# Altium PCB Relay_Board.PcbDoc
Units mm, origin at the board's own origin, x right, y up, seen from the top; angles counter-clockwise.
Board outline 36.96 x 35.69 mm, 2 copper layers (Top Layer, Bottom Layer); 5 components, 4 nets, 15 pads, 0 vias.
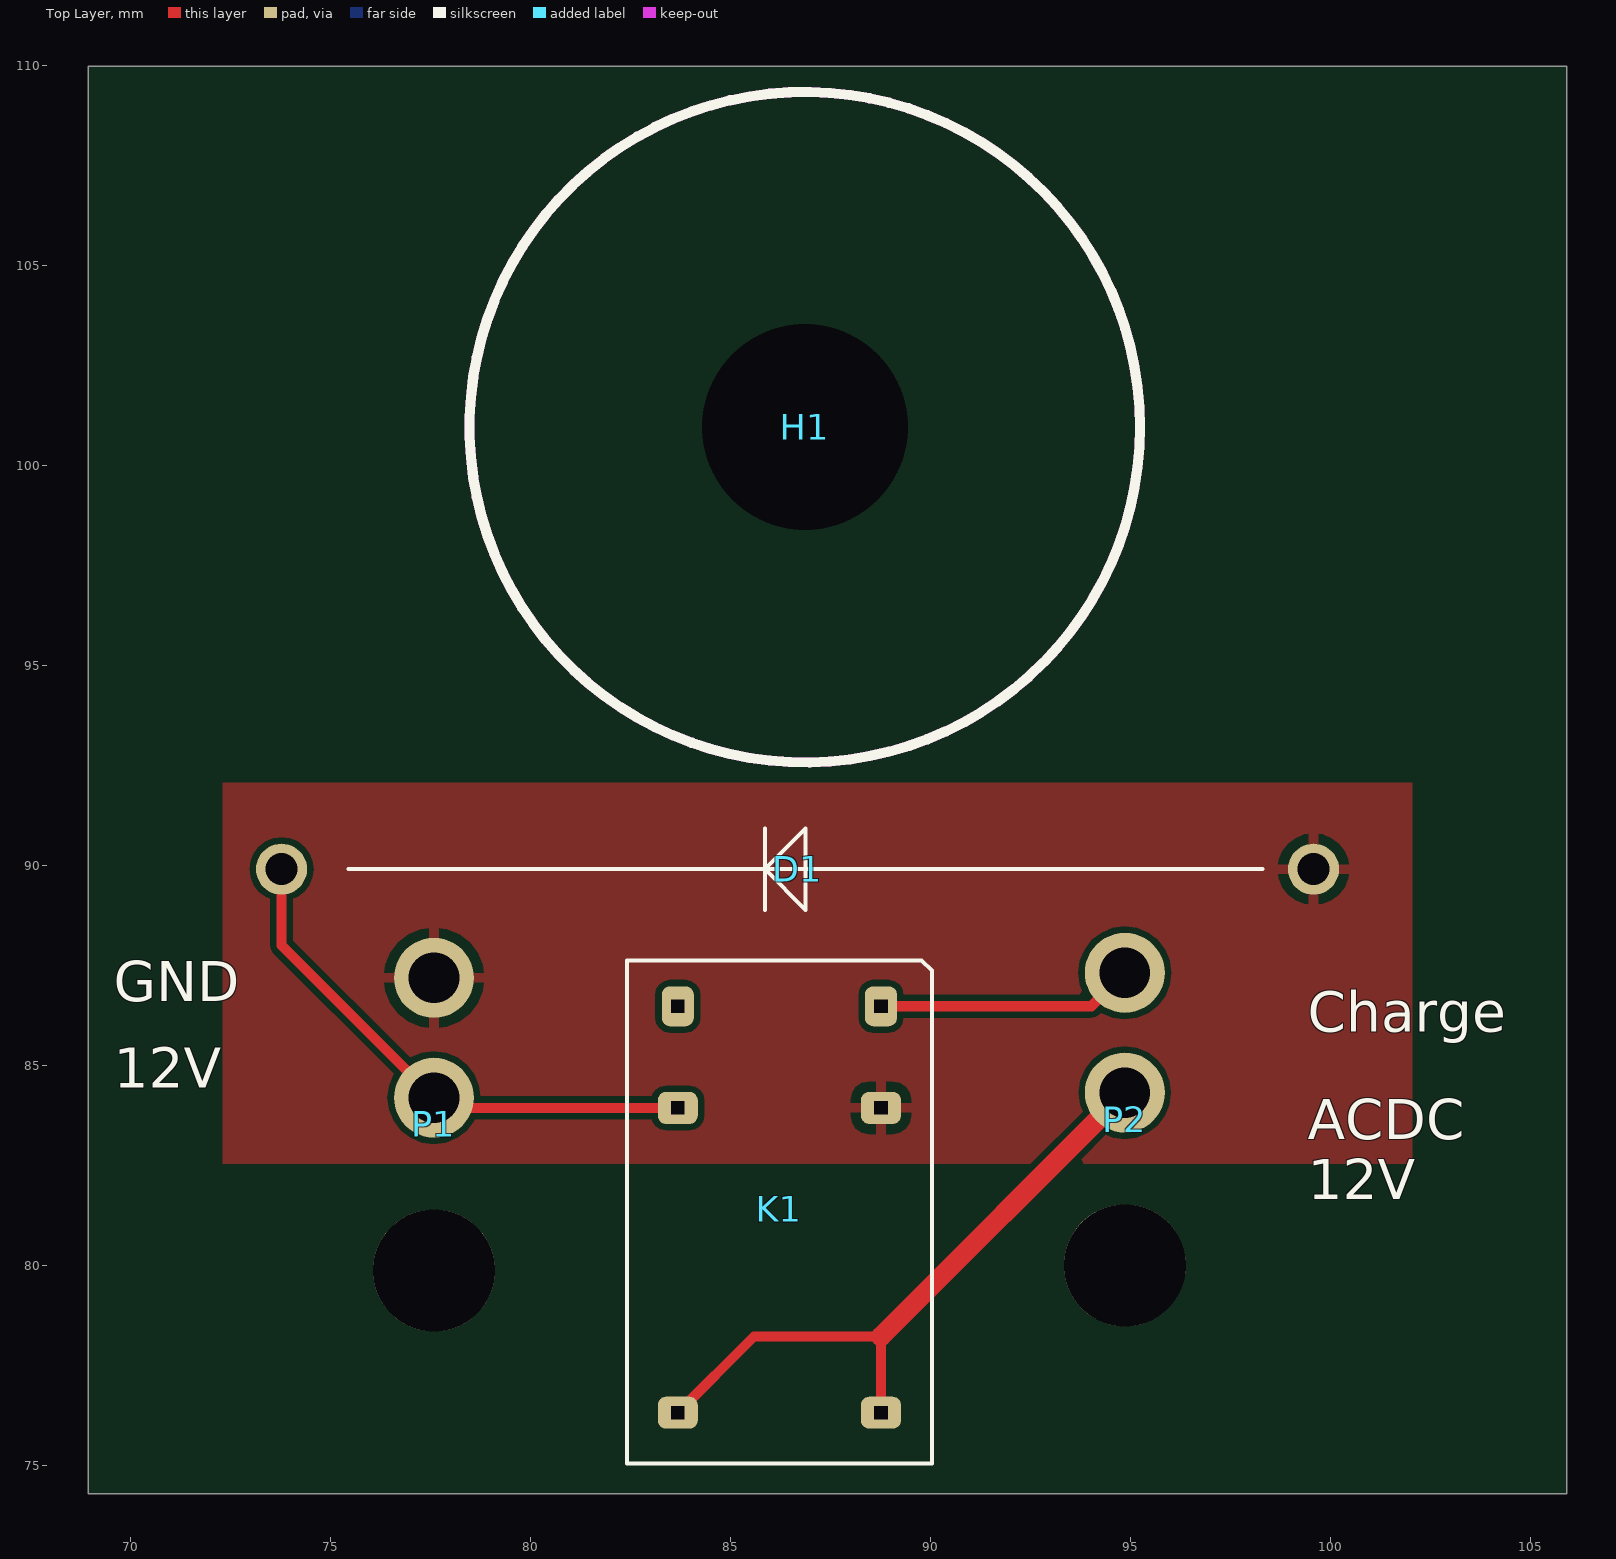
[diagram p0: Top Layer view]
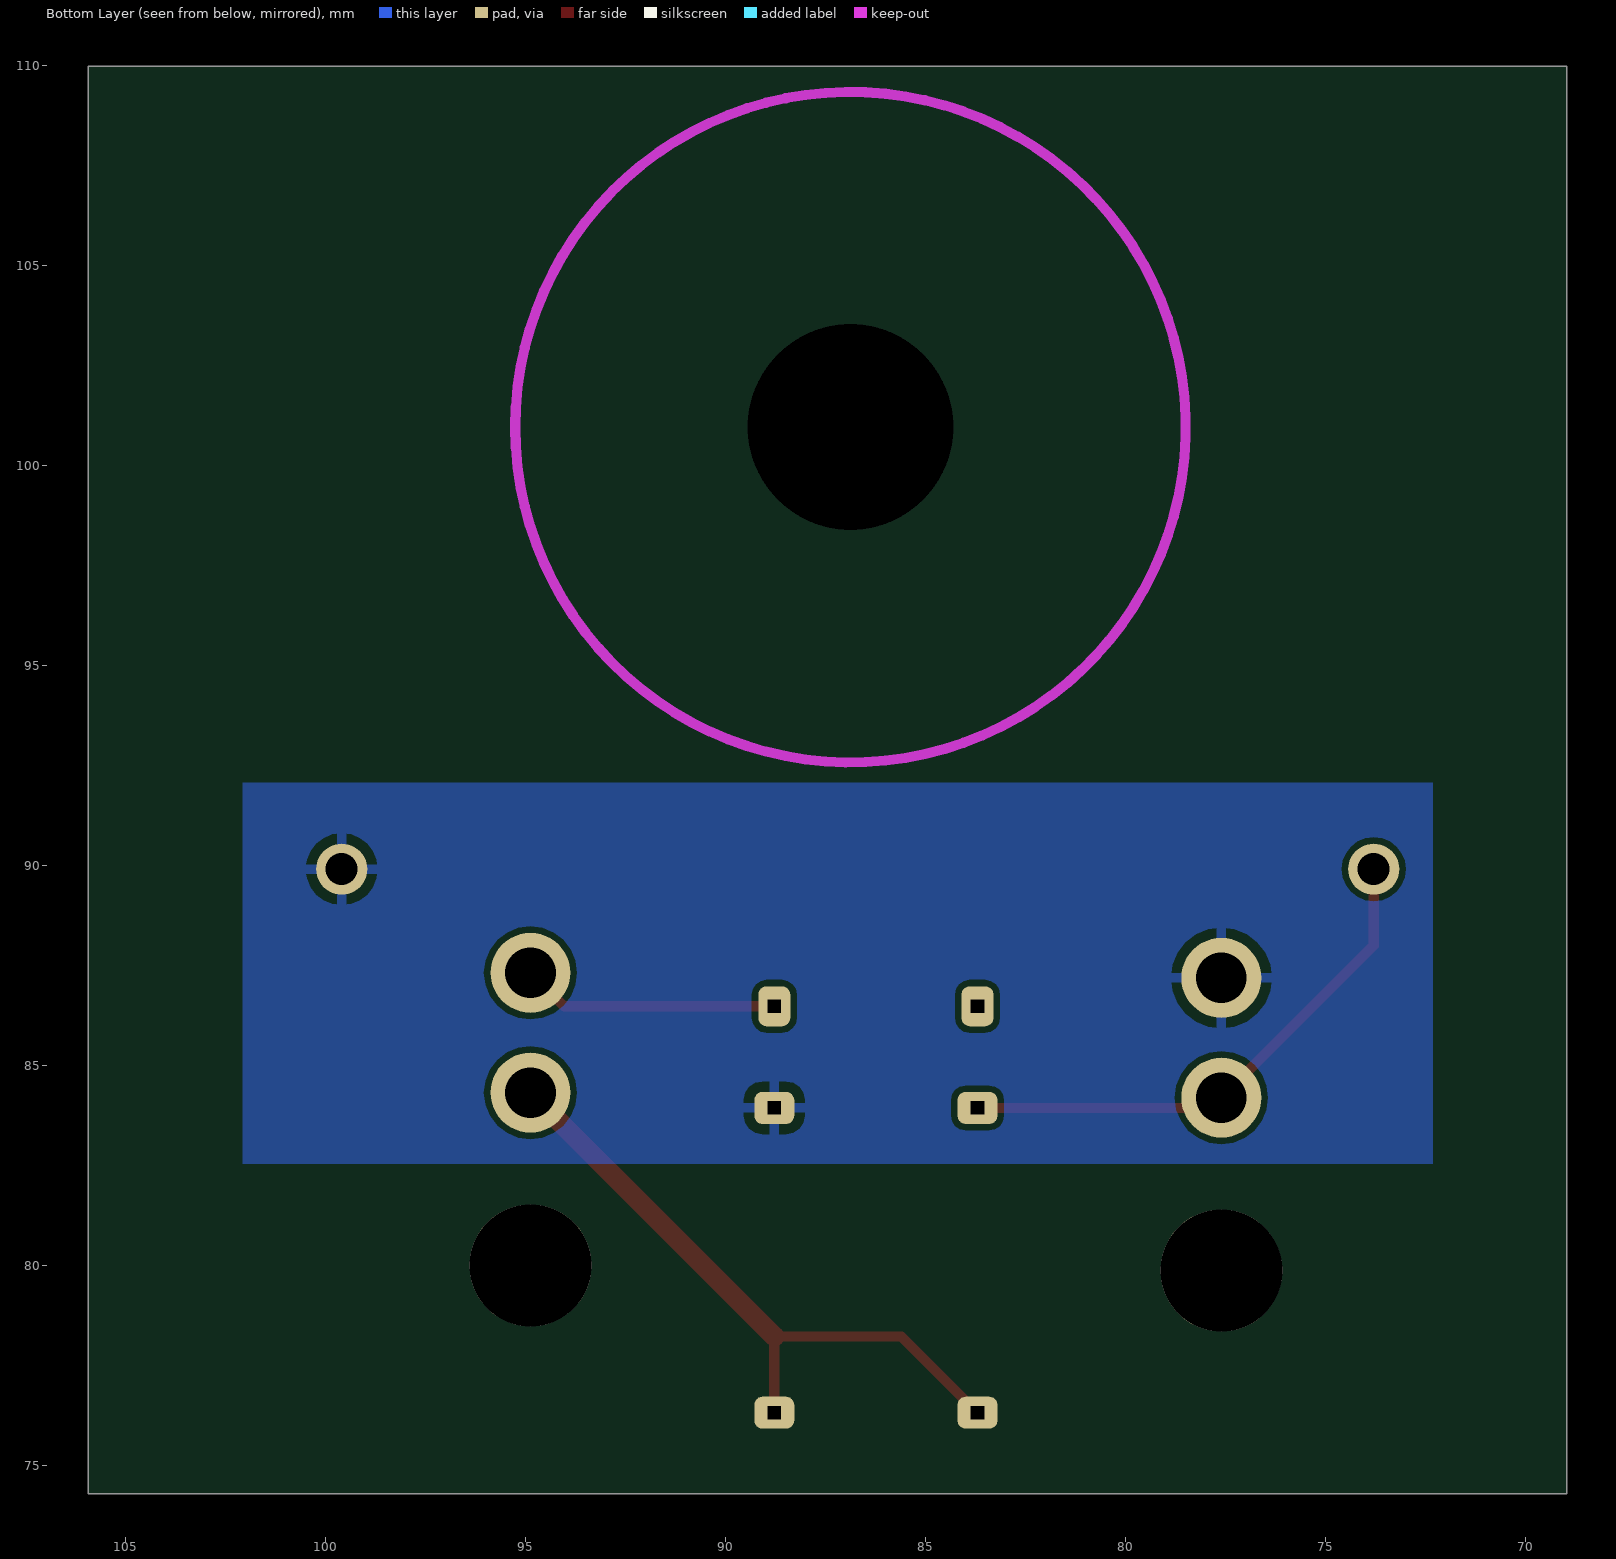
[diagram p1: Bottom Layer view, seen from below]
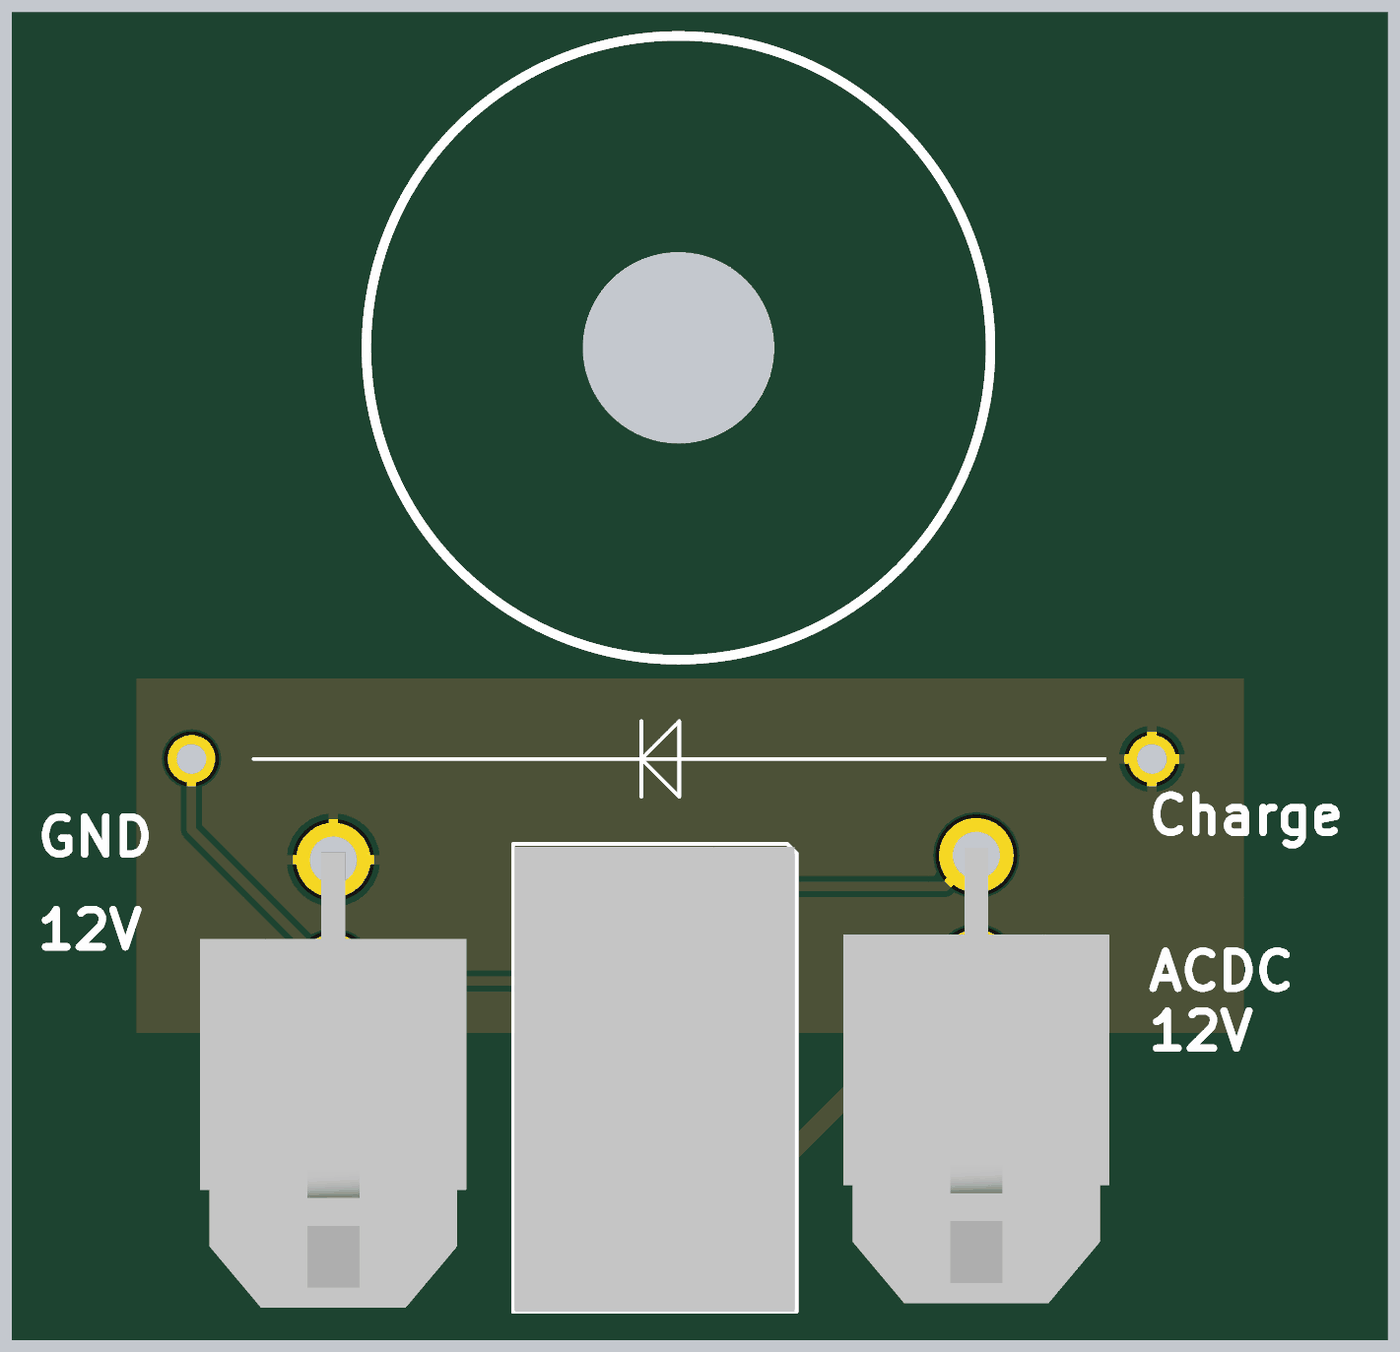
[diagram p2: 3D render of the assembled board from above, using the file's embedded part models]

## Layer stack, top to bottom
Top Solder: solder mask 0.0102, Solder Resist, Dk 3.5
Top Layer: signal copper 0.0356
Dielectric 1: dielectric 0.32, FR-4, Dk 4.8
Bottom Layer: signal copper 0.0356
Bottom Solder: solder mask 0.0102, Solder Resist, Dk 3.5

## Board outline
68.961,74.295 105.918,74.295 105.918,109.982 68.961,109.982

## Design rules (kind name [scope] priority, off if disabled: settings)
BoardOutlineClearance [All] p1: gap=0.3 ignorepadtopadclearanceinfootprint=FALSE
Clearance [All] p1: gap=0.152 ignorepadtopadclearanceinfootprint=FALSE except(0: Arc-Hole Track-Hole SMDPad-Hole THPad-Hole Via-Hole Fill-Hole Poly-Hole Region-Hole Text-Hole)
ComponentClearance [All] p1: gap=0.1 collisioncheckmode=3 verticalgap=0.254 showdistances=FALSE
FabricationTestPointUsage TestPointUsage [All] p1: valid=0 allowmultiple=FALSE
FabricationTestpoint Testpoint [All] p1: side=3 testpointundercomponent=TRUE minsize=1.016 maxsize=2.54 preferedsize=1.524 minholesize=0 maxholesize=1.016 preferedholesize=0.813 testpointgrid=0.025 allowsidetop=TRUE allowsidebottom=TRUE usegrid=TRUE gridtolerance=0
HoleSize [All] p1: absolutevalues=TRUE maxlimit=6.3 minlimit=0.3 maxpercent=80.000 minpercent=20.000
HoleToHoleClearance [All] p1: gap=0.45 allowstackedmicrovias=TRUE
MinimumAnnularRing [All] p1: minimumring=0.15
MinimumSolderMaskSliver [All] p1: minsoldermaskwidth=0.075
PlaneClearance [All] p1: clearance=0.5
PlaneConnect [All] p1: planeconnectstyle=Direct reliefexpansion=0.508 reliefentries=4 reliefconductorwidth=0.254 reliefairgap=0.254
PolygonConnect "GND Via" [isVia AND InNet('GND')] p1: connectstyle=Direct reliefconductorwidth=0.254 reliefentries=4 polygonreliefangle="90 Angle" airgapwidth=0.254 // GND Via Connection
PolygonConnect [All] p2: connectstyle=Relief reliefconductorwidth=0.254 reliefentries=4 polygonreliefangle="90 Angle" airgapwidth=0.25
RoutingVias [All] p1: holewidth=0.3 width=0.6 viastyle="Through Hole" minholewidth=0.3 minwidth=0.6 maxholewidth=6.3 maxwidth=6.6
SilkToSilkClearance [All] p1: silktosilkclearance=0.15
SilkToSolderMaskClearance SilkscreenOverComponentPads [IsPad] p1: minsilkscreentomaskgap=0.25 clearancetoexposedcopper=TRUE
SolderMaskExpansion [All] p1: expansion=0.1
Width [All] p1: maxlimit=2 minlimit=0.152 preferedwidth=0.25 minimp=50.000000 maximp=50.000000 favimp=50.000000
20 further rules are at their usual default settings.

## Components (designator, comment, footprint, x,y, rotation, side; value= is the part's Value field where it differs from the comment)
D1 "Generic Diode THT" "Generic Diode THT" 99.587,89.916 r180 top
H1 "Hole M4" #10Hole 69.342,87.376 r0 top
K1 "12V Relay Gen SPDT" "12V Relay Gen SPDT" 83.693,86.487 r90 top
P1 "SCH_MLX_1X2" PCB_MLX_MICROFIT_1X2 77.597,81.69 r0 top
P2 "SCH_MLX_1X2" PCB_MLX_MICROFIT_1X2 94.869,81.817 r0 top

## Footprints (in the part's own frame and the unit in brackets; to place one, negate y for a bottom-side part, rotate by r counter-clockwise, add the part's x,y. Pads: shape width x height; smd on the part's side, far side on the other; paste and mask are expansions set on the pad)
"12V Relay Gen SPDT" [mm]
  rrect50% 1x0.8 hole 0.33 square: 1(0,0) 10(0,-5.08)
  rrect50% 0.8x1 hole 0.33 square: 2(-2.54,0) 5(-10.16,0) 6(-10.16,-5.08) 9(-2.54,-5.08)
  silkscreen extent -11.43,-6.35 1.14,1.27, body extent -11.43,-6.29 1.07,1.21, height 10
#10Hole [mil]
  round 0 hole 202.76 unplated mask+78.74: 1(690,535)
  Keep-Out Layer circle w10: c690,535 r330
  silkscreen extent 360,205 1020,865
"Generic Diode THT" [mm]
  round 1.28 hole 0.8: 1(0,0) 2(25.8,0)
  silkscreen extent 1.27,-1.02 24.13,1.02
PCB_MLX_MICROFIT_1X2 [mm]
  round 2 hole 1.27: 1(0,2.511) 2(0,5.508)
  round 3.048 hole 3.048 unplated: ""(0,-1.807)
  body extent -3.58,-6.52 3.58,5.72, height 8.77

## Part data
H1: library part #10Hole

## Nets (pads, with @x,y where several pads share a name; then routed paths per layer and width w, separated by ;. In a path a pad name is that pad's centre, name@x,y a point inside that pad or via, vN(x,y) a via of type N, cw(c..) or ccw(c..) an arc to the next point about the centre after c; other vN are vias at no path point)
12V: D1.2 K1.2 P1.1 | length 13.5
  Top Layer w0.254: D1.2 73.787,88.011 P1.1 77.851,83.947 K1.2
GND: D1.1 K1.9 P1.2
NetK1_5: K1.5 K1.6 P2.1 | length 16.4
  Top Layer w0.254: K1.5 85.598,78.232 88.773,78.232 K1.6
  Top Layer w0.5: 88.773,78.232 P2.1
NetK1_10: K1.10 P2.2 | length 6.4
  Top Layer w0.254: K1.10 94.031,86.487 P2.2
pads on no net: H1.1 K1.1 P1. P2.

## Polygon pours and split planes (outlines as drawn)
GND on Bottom Layer "Bottom Layer - GND" (solid, pour order 10): 72.009,92.075 102.235,92.075 102.235,82.55 72.009,82.55
GND on Top Layer "Top Layer - GND" (solid, pour order 8): 72.009,92.075 102.235,92.075 102.235,82.55 72.009,82.55

## Silkscreen, mask and mechanical layers (free items; w line width, h text height)
Top Overlay:
  text "GND" at 69.596,86.614 h1
  text "Charge" at 99.441,85.852 h1
  text "12V" at 69.596,84.455 h1
  text "ACDC / 12V" at 99.441,81.661 h1
Mechanical 2:
  the board outline again, w0.25